# Altium PCB ina226.PcbDoc
Units mil, origin at the board's own origin, x right, y up, seen from the top; angles counter-clockwise.
Board outline 1181.1 x 866.14 mil, 2 copper layers (Top Layer, Bottom Layer); 12 components, 10 nets, 34 pads, 92 vias.
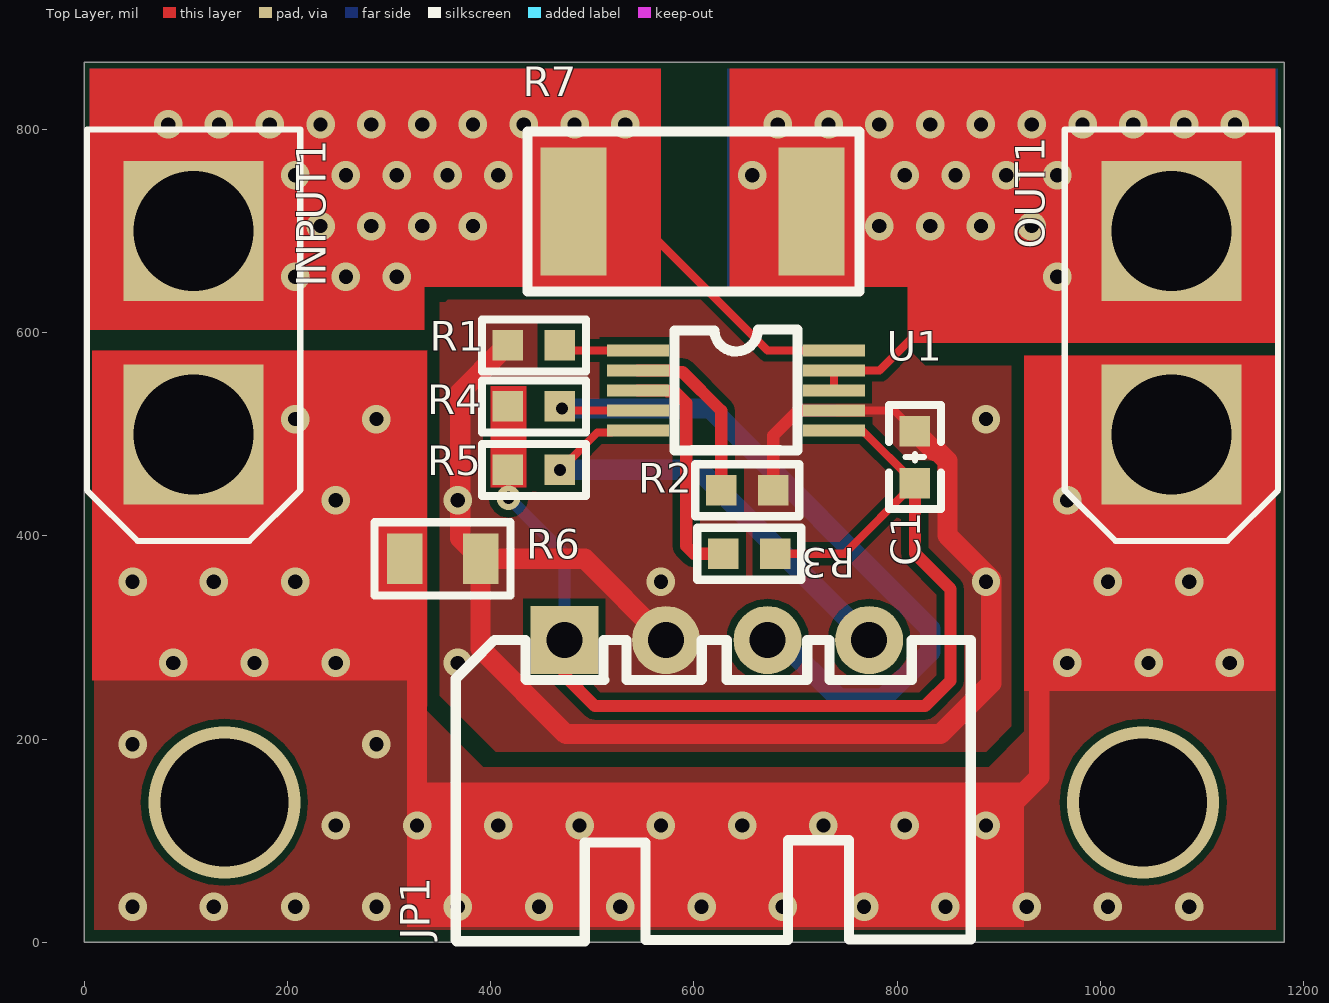
[diagram p0: Top Layer view]
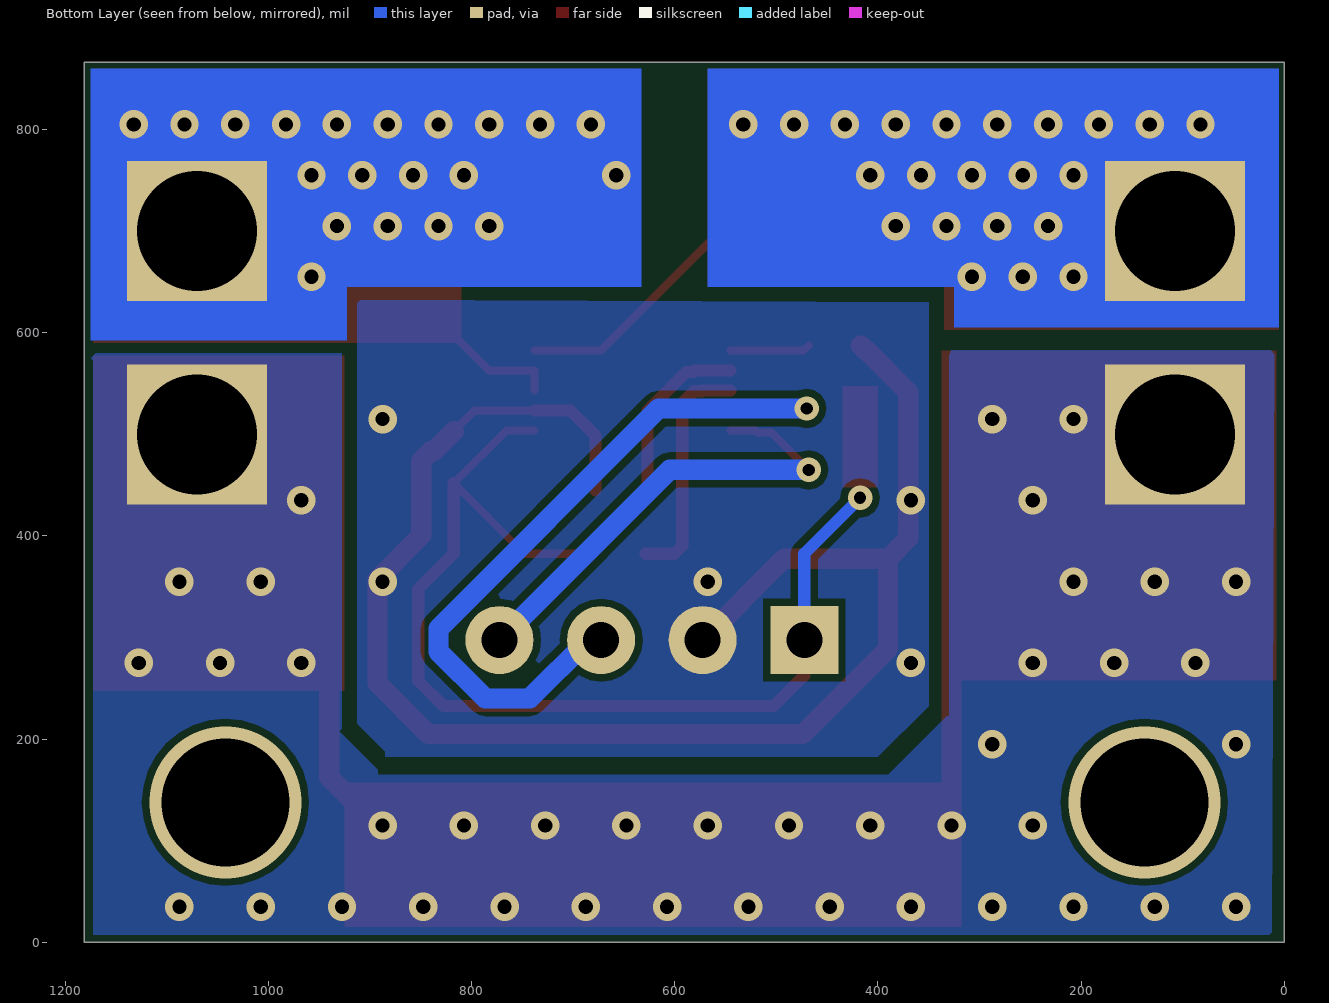
[diagram p1: Bottom Layer view, seen from below]
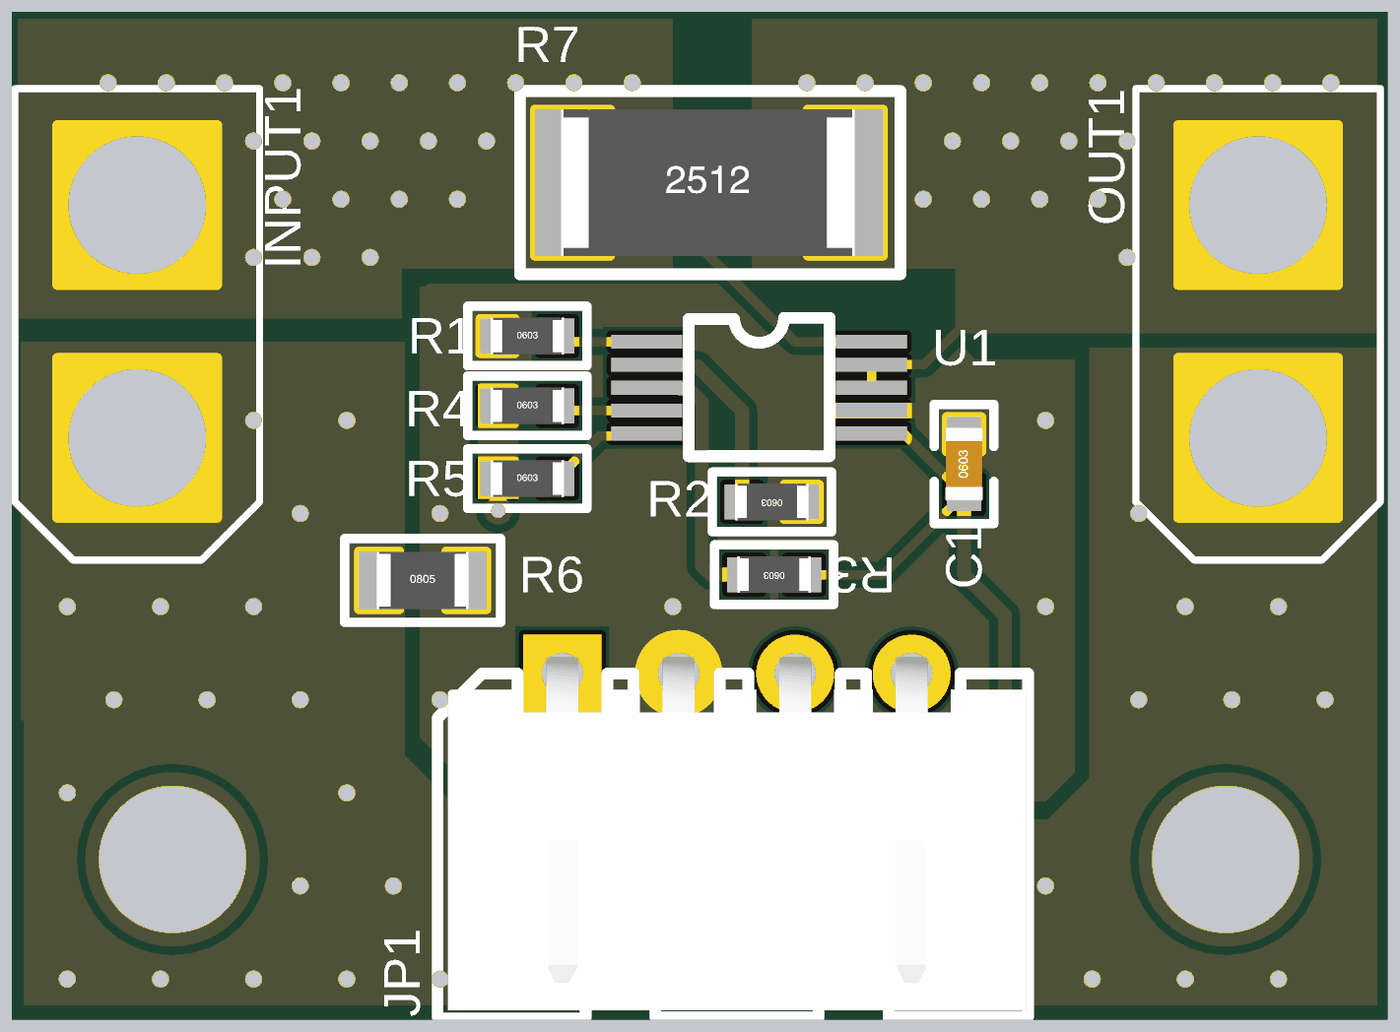
[diagram p2: 3D render of the assembled board from above, using the file's embedded part models]

## Layer stack, top to bottom
Top Solder: solder mask 0.4, Solder Resist, Dk 3.5
Top Layer: signal copper 1.4
Dielectric 1: dielectric 12.6, FR-4, Dk 4.8
Bottom Layer: signal copper 1.4
Bottom Solder: solder mask 0.4, Solder Resist, Dk 3.5

## Board outline
0,0 0,866.14 1181.1,866.14 1181.1,0

## Design rules (kind name [scope] priority, off if disabled: settings)
Clearance [All] p1: gap=7 ignorepadtopadclearanceinfootprint=TRUE except(0: Arc-Hole Track-Hole SMDPad-Hole THPad-Hole Via-Hole Fill-Hole Poly-Hole Region-Hole Text-Hole)
Length [InNetClass('lengthClass')] p1: maxlimit=99999 minlimit=0 usedelayunits=FALSE
PlaneConnect [All] p1: planeconnectstyle=Direct reliefexpansion=20 reliefentries=4 reliefconductorwidth=10 reliefairgap=10
PolygonConnect [All] p1: connectstyle=Direct reliefconductorwidth=10 reliefentries=4 polygonreliefangle="90 Angle" airgapwidth=10
RoutingVias [All] p1: holewidth=28 width=50 viastyle="Through Hole" minholewidth=28 minwidth=50 maxholewidth=28 maxwidth=50
SolderMaskExpansion [All] p1: expansion=4
Width [All] p1: maxlimit=99999 minlimit=8 preferedwidth=10
29 further rules are at their usual default settings.

## Components (designator, comment, footprint, x,y, rotation, side; value= is the part's Value field where it differs from the comment)
C1 "0.1uF" "C 0603_L" 817.5,477.5 r90 top
INPUT1 "XT30" XT30 212.5,395 r90 top
JP1 "HDR-1X4" XH2.54-WI-4P 622.5,297.5 r0 top
OUT1 "XT30" XT30 1175,395 r90 top
R1 "10K" "R 0603_L" 442.5,587.5 r0 top
R2 "10K" "R 0603_L" 652.5,445 r180 top
R3 "10K" "R 0603_L" 654.41,382.5 r180 top
R4 "10K" "R 0603_L" 442.5,527.5 r0 top
R5 "10K" "R 0603_L" 442.5,465 r0 top
R6 "0R" "R 0805_L" 352.6,377.5 r0 top
R7 "10mR" "R 2512_L" 597.5,719.26 r0 top
U1 "INA226" MSOP-10 585,547.5 r0 top

## Footprints (in the part's own frame and the unit in brackets; to place one, negate y for a bottom-side part, rotate by r counter-clockwise, add the part's x,y. Pads: shape width x height; smd on the part's side, far side on the other; paste and mask are expansions set on the pad)
"C 0603_L" [mil] "无极性贴片电容                                       淘宝ID:黄晶宝石"
  rect 30x30 smd: 1(-25.59,0) 2(25.59,0)
  silkscreen extent -51,-26 51,26, body extent -31,-16 31,16, height 32
MSOP-10 [mil]
  rect 61.02x12 smd: 1(-40,35) 2(-40,15.31) 3(-40,-4.37) 4(-40,-24.06) 5(-40,-43.74) 6(153,-43.74) 7(153,-24.06) 8(153,-4.37) 9(153,15.31) 10(153,35)
  silkscreen extent -4,-63 117,56
"R 0603_L" [mil] "1/10W贴片电阻                 淘宝ID:黄晶宝石"
  rect 30x30 smd: 1(-25.59,0) 2(25.59,0)
  silkscreen extent -51,-26 51,26, body extent -31,-16 32,16, height 16
"R 0805_L" [mil] "1/8W贴片电阻"
  rect 35x50 smd: 1(-37.4,0) 2(37.4,0)
  silkscreen extent -67,-36 67,36, body extent -39,-25 39,25, height 20
"R 2512_L" [mm] "1W贴片电阻"
  rect 1.65x3.2 smd: 1(-2.95,0) 2(3,0)
  silkscreen extent -4.1,-2 4.2,2, body extent -3.2,-1.6 3.2,1.6, height 0.55
XH2.54-WI-4P [mm] "接插件，4P"
  rect 1.7x1.7 hole 0.9: 1(-3.81,0)
  round 1.7 hole 0.9: 2(-1.27,0) 3(1.27,0) 4(3.81,0)
  silkscreen extent -6.53,-7.53 6.35,0, body extent -6.31,-7.35 6.31,0.35, height 5.73
XT30 [mm]
  rect 3.5x3.5 hole 3: 1(2.667,2.667) 2(7.747,2.667)
  silkscreen extent 0,0 10.29,5.33

## Part data
C1: library part C, "贴片电容"
JP1: library part "Header 4", "4P接插件", BOM名称=4P, 学习资源=https://shop463601444.taob, 版权归属=·â×
R1 R2 R3 R4 R5 R6 R7: library part R, "贴片电阻"
U1: library part ina226

## Via types
v1: diameter 28, hole 14, Top Layer to Bottom Layer, tented both sides, 87 vias
v2: diameter 24, hole 12, Top Layer to Bottom Layer, tented both sides, 3 vias
v3: diameter 149.61, hole 125.98, Top Layer to Bottom Layer, tented both sides, 2 vias

## Nets (pads, with @x,y where several pads share a name; then routed paths per layer and width w, separated by ;. In a path a pad name is that pad's centre, name@x,y a point inside that pad or via, vN(x,y) a via of type N, cw(c..) or ccw(c..) an arc to the next point about the centre after c; other vN are vias at no path point)
AGND: INPUT1.1 OUT1.1 R6.1 | length 1041.9
  Top Layer w20: 237.5,377.5 237.5,347.5 280,305 290,305 327.5,267.5 327.5,144.22 356.72,115 v1(407.5,115) v1(487.5,115) v1(567.5,115) v1(647.5,115) v1(727.5,115) v1(807.5,115) 892.5,115 940,162.5 940,257.5 955,272.5 v1@960,272.5
  other v1: 47.5,35 127.5,35 207.5,35 287.5,35 367.5,35 447.5,35 527.5,35 607.5,35 687.5,35 767.5,35 847.5,35 927.5,35 1007.5,35 1087.5,35 247.5,115 327.5,115 887.5,115 47.5,195 287.5,195 87.5,275 167.5,275 247.5,275 967.5,275 1047.5,275 1127.5,275 47.5,355 127.5,355 207.5,355 1007.5,355 1087.5,355 247.5,435 967.5,435 207.5,515 287.5,515
GND: C1.2 JP1.2 R1.1 R2.1 R6.2 U1.7 | length 1593
  Top Layer w8: U1.7 797.15,523.44 C1.2
  Top Layer w12: R2.1 678.09,498.75 702.79,523.44 U1.7
  Top Layer w20: R1.1 411.91,582.5 410.96,582.5 370,541.54 370,397.5 R6.2 ; JP1.2 492.5,377.5 R6.2 ; C1.2 836.65,483.95 839.51,483.95 849.5,473.95 849.5,400.5 892.5,357.5 892.5,255 842.5,205 474.03,205 390,289.03 R6.2
  other v1: 367.5,275 567.5,355 887.5,355 367.5,435 887.5,515
NetR1_2: R1.2 U1.1 | length 79
  Top Layer w8: R1.2 473.08,582.5 U1.1
NetR2_2: R2.2 U1.2 | length 176.6
  Top Layer w12: U1.2 580.21,562.81 581.58,561.44 588.76,561.44 626.91,523.29 R2.2
NetR3_2: R3.2 U1.3 | length 232.9
  Top Layer w12: U1.3 573.02,543.13 573.71,542.44 580.89,542.44 592.5,530.83 592.5,390 600,382.5 R3.2
SCL: JP1.4 R5.2 U1.5 | length 466.8
  Top Layer w8: v2(468.09,465) 504.85,501.76 518.49,501.76 520.49,503.76 U1.5
  Bottom Layer w20: v2(468.09,465) 605,465 JP1.4
SDA: JP1.3 R4.2 U1.4 | length 756.4
  Top Layer w8: R4.2 v2(470.12,525.47) 472.14,523.44 U1.4
  Bottom Layer w20: v2(470.12,525.47) 615.9,525.47 832.5,308.87 832.5,286.13 786.37,240 742.7,240 685.2,297.5 JP1.3
VCC: C1.1 JP1.1 R3.1 R4.1 R5.1 U1.6 | length 1104.4
  Top Layer w8: R3.1 748.1,382.5 C1.1 765.65,503.76 U1.6
  Top Layer w12: R5.1 417.2,464.7 417.2,437.8 v2(417.5,437.5) ; JP1.1 472.5,262.5 502.5,232.5 827.5,232.5 852.5,257.5 852.5,347.73 817.5,382.73 C1.1
  Bottom Layer w12: v2(417.5,437.5) 472.5,382.5 JP1.1
VCC24V: INPUT1.2 R7.1 U1.10 | length 313.3
  Top Layer w8: R7.1 535.74,719.26 672.5,582.5 U1.10
  other v1: 207.5,655 257.5,655 307.5,655 232.5,705 282.5,705 332.5,705 382.5,705 207.5,755 257.5,755 307.5,755 357.5,755 407.5,755 82.5,805 132.5,805 182.5,805 232.5,805 282.5,805 332.5,805 382.5,805 432.5,805 482.5,805 532.5,805
VIN-: OUT1.2 R7.2 U1.8 U1.9 | length 408.5
  Top Layer w8: U1.8 U1.9 782.81,562.81 920,700 OUT1.2
  other v1: 957.5,655 782.5,705 832.5,705 882.5,705 932.5,705 657.5,755 807.5,755 857.5,755 907.5,755 957.5,755 682.5,805 732.5,805 782.5,805 832.5,805 882.5,805 932.5,805 982.5,805 1032.5,805 1082.5,805 1132.5,805
copper on no net:
  other v3: 137.8,137.8 1042.2,137.8

## Polygon pours and split planes (outlines as drawn)
GND on Top Layer "Top Layer-GND" (solid, remove dead copper, pour order 46): 350,630 350,242.5 405,187.5 887.5,187.5 912.5,212.5 912.5,567.5 827.5,567.5 792.5,602.5 795,605 795,632.5 357.5,632.5 355,630
AGND on Top Layer "Top Layer-AGND" (solid, remove dead copper, pour order 44): 925,577.5 925,207.5 890,172.5 392.5,172.5 335,230 337.5,232.5 337.5,582.5 10,582.5 10,12.5 1172.5,12.5 1172.5,577.5
AGND on Bottom Layer "Bottom Layer-AGND" (solid, pour order 50): 10,582.5 330,582.5 332.5,580 330,577.5 330,222.5 332.5,222.5 390,165 892.5,165 892.5,170 930,207.5 927.5,210 927.5,580 1170,580 1175,575 1172.5,572.5 1172.5,7.5 15,7.5 12.5,10
GND on Bottom Layer "Bottom Layer-GND" (solid, pour order 48): 350,630 350,232.5 400,182.5 885,182.5 885,187.5 912.5,215 912.5,632.5

## Other copper
Top Layer:
  rectangle net AGND: 317.5,15 925,157.5
  rectangle net AGND: 925,247.5 1172.5,577.5
  rectangle net AGND: 7.5,257.5 337.5,582.5
  rectangle net VCC: 400,447.5 435,547.5
  rectangle net VIN-: 810,590 1172.5,860
  rectangle net VCC24V: 5,602.5 335,860
  rectangle net VIN-: 635,645 1172.5,860
  rectangle net VCC24V: 5,645 567.5,860
Bottom Layer:
  rectangle net VIN-: 632.5,645 1175,860
  rectangle net VIN-: 922.5,592.5 1175,860
  rectangle net VCC24V: 5,645 567.5,860
  rectangle net VCC24V: 5,605 325,860

## Silkscreen, mask and mechanical layers (free items; w line width, h text height)
Drill Drawing:
  the board outline again, w10